# EAGLE board filaSens (EAGLE 9.6.2)
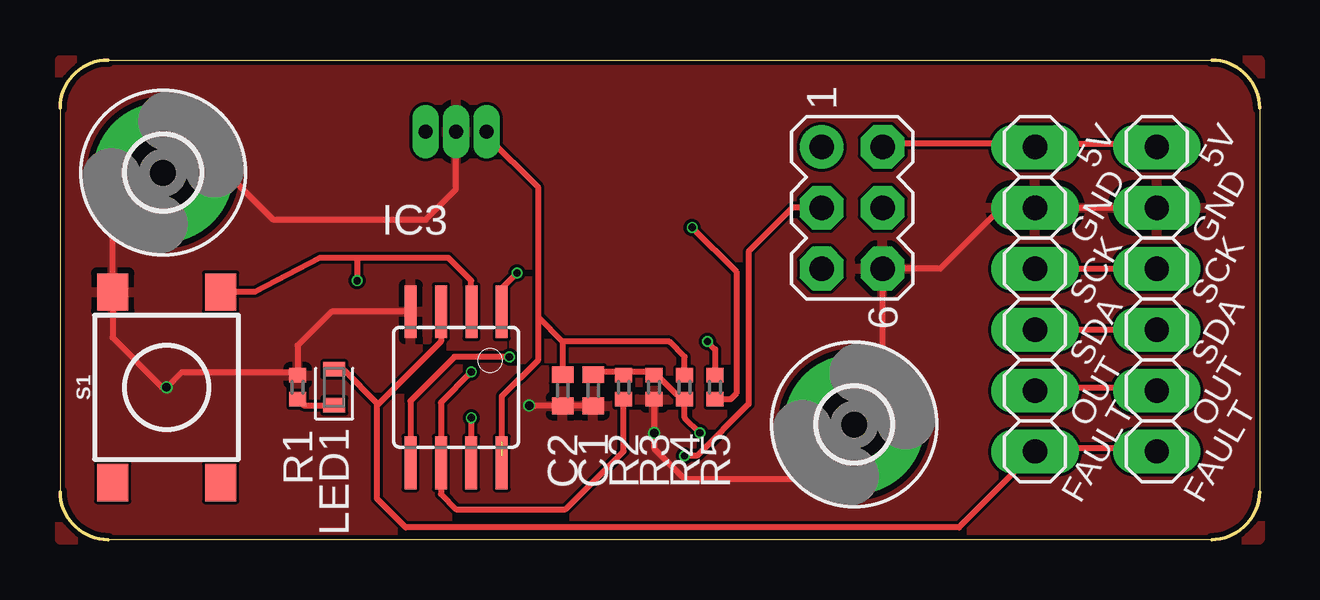
[diagram p0: board, top side]
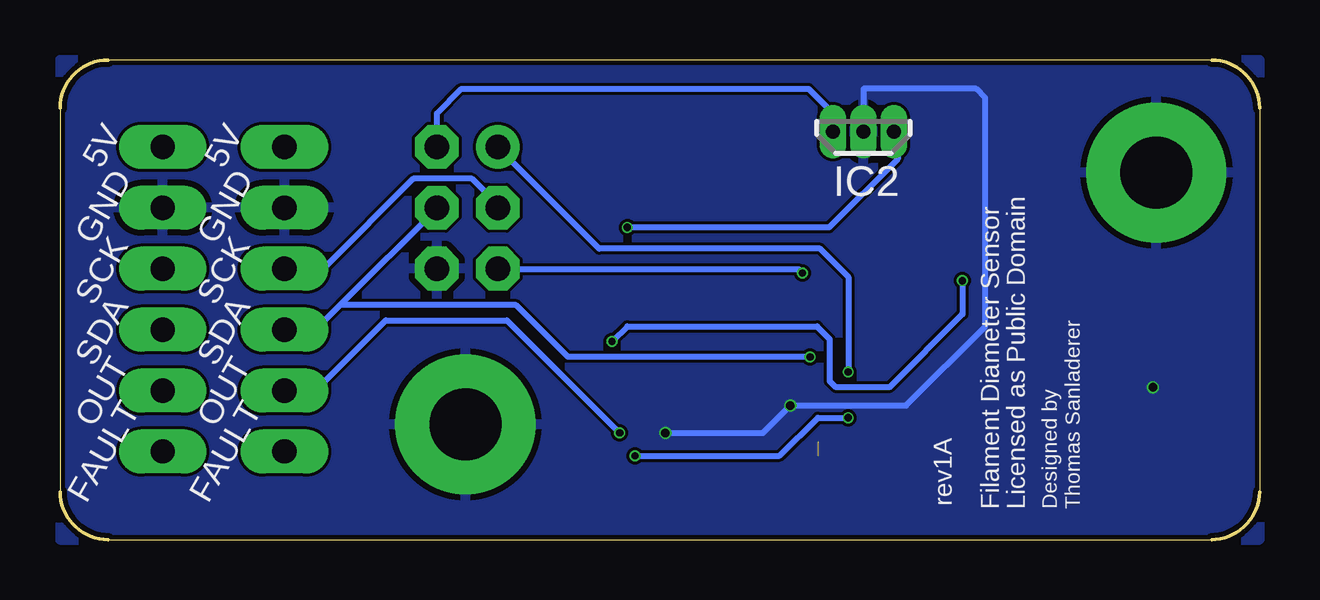
[diagram p1: board, bottom side, seen from below]

Size 50 x 20 mm. Coordinates in mm from the lower left corner, seen from the top.
Outline: 0,18 0,2 arc90 2,0 48,0 arc90 50,2 50,18 arc90 48,20 2,20 arc90 0,18
Copper layers (1*16): Top 0.035mm / dielectric 1.6mm / Bottom 0.035mm
Design rules "jlcpcb-2layers": minimum track width 5mil, minimum drill 0.3mm, track to track 5mil, track to pad 5mil, pad to pad 5mil, via to via 5mil, smd to smd 5mil, copper to edge 0.2mm, drill to drill 6mil, minimum pad ring 10mil, minimum via ring 3mil, stop-mask expansion 4mil, vias tented up to drill 0mil, thermal gap 10mil
Net classes: 0 default: width 0.254 mm; 1 power: width 0.254 mm

## Footprints (pad centres in the part's own frame; a part is rotated, then mirrored left to right if it is on the bottom)
C0402 = smd 0.7 x 0.9: 1 -0.65,0; 2 0.65,0
3,0-PAD = drill 3 pad 5.842: B3,0 0,0
SIP3-UA = drill 0.6 pad 0.7 long: 1 -1.27,0; 2 0,0; 3 1.27,0
SOIC8 = smd 0.5 x 2.2: 1 -1.905,-3.154; 2 -0.645,-3.154; 3 0.625,-3.154; 4 1.895,-3.154; 5 1.905,3.154; 6 0.635,3.154; 7 -0.635,3.154; 8 -1.905,3.154
1X06 = drill 1.016 long: 1 -6.35,0; 2 -3.81,0; 3 -1.27,0; 4 1.27,0; 5 3.81,0; 6 6.35,0
LEDC1608X35N_FLAT-Y = smd 0.612 x 0.912: A 0.75,0; C -0.75,0
R0402 = smd 0.6 x 0.7: 1 -0.5,0; 2 0.5,0
TACTILE_SWITCH_SMD_6.2MM_TALL = smd 1.55 x 1.3: A1 -3.975,-2.25; A2 3.975,-2.25; B1 -3.975,2.25; B2 3.975,2.25
MA03-2 = drill 1.016: 1 -2.54,-1.27 | drill 1.016 octagon: 2 -2.54,1.27; 3 0,-1.27; 4 0,1.27; 5 2.54,-1.27; 6 2.54,1.27

## Placement (x,y rotation side)
C1  10uF  [C0402]  22.23,6.22 270 top
C2  10uF  [C0402]  20.95,6.22 270 top
H1  MOUNT-PAD-ROUND3.0  [3,0-PAD]  33.1,4.8 0 top
H2  MOUNT-PAD-ROUND3.0  [3,0-PAD]  4.3,15.3 0 top
IC2  SS495  [SIP3-UA]  16.51,17.01 0 bottom
IC3  TINY85  [SOIC8]  16.51,6.35 180 top
JP1  OUTPUT  [1X06]  40.64,10.03 270 top
JP2  SUPPORT_ROW  [1X06]  45.72,10.03 270 top
LED1  CHIP-FLAT-Y_0603-0.35MM  [LEDC1608X35N_FLAT-Y]  11.43,6.35 90 top
R1  1k  [R0402]  9.91,6.35 90 top
R2  36k  [R0402]  23.5,6.35 90 top
R3  9k1  [R0402]  24.77,6.35 90 top
R4  18k  [R0402]  26.04,6.35 90 top
R5  4k7  [R0402]  27.3,6.35 270 top
S1  MOMENTARY-SWITCH-SPST-SMD-6.2MM-TALL  [TACTILE_SWITCH_SMD_6.2MM_TALL]  4.45,6.35 90 top
SV1  ISP  [MA03-2]  33.02,13.84 270 top

## Library data of the parts
C1 C2 = rcl; SPICEPREFIX: C
H1 H2 = holes
IC2 = allegro; MF: ALLEGRO MICROSYSTEMS, INC.; MPN: A1302EUA-T; OC_FARNELL: 1521708; OC_NEWARK: 31K6639
IC3 = atmel; OC_FARNELL: unknown; OC_NEWARK: unknown
JP1 JP2 = pinhead
LED1 = LED; CATEGORY: LED; COLOR: YELLOW; DESCRIPTION: CHIP LED FLAT; SUB-CATEGORY: CHIP; TYPE: FLAT_TOP
R1-R5 = rcl; SPICEPREFIX: R
S1 = SparkFun-Switches; PROD_ID: SWCH-11966; SF_SKU: COM-12992
SV1 = con-lstb; OC_FARNELL: unknown; OC_NEWARK: unknown

## Nets
+5V [power]: C2.1 IC2.1 IC3.8 JP1.1 JP2.1 R4.2 SV1.2
FAULT: IC3.3 JP1.6 JP2.6 LED1.A
GND [power]: C1.2 C2.2 H1.B3,0 H2.B3,0 IC2.2 IC3.4 JP1.2 JP2.2 R1.2 R3.1 S1.B2 SV1.6
IN: IC3.2 R5.1 S1.A2
MISO: IC3.6 R2.1 SV1.1
N$1: IC2.3 R5.2
N$2: LED1.C R1.1
OUT: C1.1 JP1.5 JP2.5 R2.2 R3.2 R4.1
RESET: IC3.1 SV1.5
SCK: IC3.7 JP1.3 JP2.3 SV1.3
SDA: IC3.5 JP1.4 JP2.4 SV1.4

## Tracks (layer width: path | path; a pad name or v marks a point on that pad's centre or on a via)
+5V  (1 unrouted)
  Top 0.254: 40.64,16.51 34.29,16.51 SV1.2 | 40.64,16.51 45.72,16.51 JP2.1 | 40.64,16.51 JP1.1 | 19.94,9.27 19.94,7.49 18.41,5.97 18.41,4.06 | 19.94,9.27 19.94,14.67 17.78,16.83 IC2.1 | IC3.8 18.38,3.24 18.38,3.4 18.41,3.49 | R4.2 26.04,7.62 25.4,8.26 20.95,8.26 | 19.94,9.27 20.95,8.26 | 20.95,8.26 C2.1
  Bottom 0.254: SV1.2 34.29,17.78 33.27,18.8 18.8,18.8 17.78,17.78 IC2.1
FAULT
  Top 0.254: JP2.6 45.72,3.81 40.64,3.81 JP1.6 37.47,0.51 14.41,0.51 13.21,1.71 13.21,5.7 | IC3.3 15.88,9.21 15.88,8.26 13.27,5.65 13.21,5.7 | 13.21,5.7 11.87,7.04 11.49,7.04 LED1.A
GND  (via drill 0.35)
  Top 0.254: 9.91,6.99 R1.2 | JP2.2 JP1.2 39.23,13.84 36.7,11.29 SV1.6 34.29,5.99 H1.B3,0 30.84,2.54 26.04,2.54 24.77,3.81 v24.77,4.45 R3.1 | 9.91,6.99 5.08,6.99 v4.45,6.35 4.26,6.35 2.19,8.42 S1.B2 2.19,13.2 H2.B3,0 6.92,15.3 8.89,13.34 15.24,13.34 16.51,14.61 IC2.2 | 9.91,6.99 9.91,8.1 11.31,9.5 IC3.4 | C2.2 20.93,5.6 | C1.2 C2.2 | v19.56,5.59 19.57,5.57 C2.2
  Bottom 0.254: IC2.2 16.51,18.8 11.81,18.8 11.43,18.41 11.43,8.89 14.73,5.59 v19.56,5.59 20.7,4.45 v24.77,4.45
  pour Bottom: 0,20 50,20 50,0 0,0
  pour Top (rank 3): 0,20 50,20 50,0 0,0
IN  (via drill 0.3)
  Top 0.254: 12.38,11.75 10.82,11.75 8.12,10.32 S1.A2 | 12.38,11.75 16.19,11.75 17.14,10.79 17.14,9.53 IC3.2 | 12.38,11.75 v12.38,10.79 | v26.99,8.26 27.3,7.94 R5.1
  Bottom 0.254: v12.38,10.79 12.38,9.4 15.43,6.35 17.65,6.35 17.91,6.6 17.91,8.35 18.45,8.89 26.35,8.89 v26.99,8.26
MISO  (via drill 0.3)
  Top 0.254: R2.1 23.5,3.68 21.08,1.27 16.51,1.27 15.88,1.91 IC3.6 15.88,5.71 v17.14,6.99
  Bottom 0.254: SV1.1 31.75,16.35 27.53,12.13 18.32,12.13 17.14,10.95 v17.14,6.99
N$1  (via drill 0.3)
  Top 0.254: v26.35,13.02 28.19,11.18 28.19,6.1 27.95,5.85 R5.2
  Bottom 0.254: IC2.3 15.24,16.99 15.08,16.99 15.08,15.88 17.94,13.02 v26.35,13.02
N$2
  Top 0.254: R1.1 10.16,5.6 LED1.C
OUT  (via drill 0.3)
  Top 0.254: 24.77,6.99 23.5,6.99 | 24.77,6.99 25.72,6.03 26.04,6.03 R4.1 26.04,5.08 v26.67,4.45 | 24.77,6.99 R3.2 | 23.5,6.99 22.23,6.99 C1.1 | 23.5,6.99 R2.2 | JP2.5 45.72,6.35 40.64,6.35 JP1.5
  Bottom 0.254: JP1.5 40.52,6.1 39.47,6.1 36.42,9.14 31.37,9.14 v26.67,4.45
RESET  (via drill 0.3)
  Top 0.254: IC3.1 18.41,10.48 v19.05,11.11
  Bottom 0.254: SV1.5 31.75,11.27 19.21,11.27 v19.05,11.11
SCK  (via drill 0.3)
  Top 0.254: v17.14,5.08 IC3.7 | JP2.3 45.72,11.3 40.64,11.3 JP1.3 | SV1.3 30.54,13.84 28.7,12 28.7,5.65 26.54,3.49 v26.04,3.49
  Bottom 0.254: JP1.3 40.57,11.37 38.96,11.37 35.27,15.05 32.83,15.05 31.75,13.97 SV1.3 | v17.14,5.08 18.41,5.08 20,3.49 v26.04,3.49
SDA  (via drill 0.3)
  Top 0.254: IC3.5 14.61,5.78 16.45,7.62 v18.73,7.62 | JP2.4 JP1.4
  Bottom 0.254: SV1.4 34.29,13.81 38.32,9.78 | 39.21,9.21 39.66,8.76 JP1.4 39.35,8.76 38.32,9.78 | v18.73,7.62 28.83,7.62 30.99,9.78 38.32,9.78

## Text on the board
tNames: 5V | 5V | GND | GND | SCK | SCK | SDA | SDA | OUT | OUT | FAULT | FAULT
bNames: 5V | 5V | GND | GND | SCK | SCK | SDA | SDA | OUT | OUT | Designed by / Thomas Sanladerer | Licensed as Public Domain | Filament Diameter Sensor | rev1A | FAULT | FAULT